# Altium PCB PCB1.PcbDoc
Units mil, origin at the board's own origin, x right, y up, seen from the top; angles counter-clockwise.
Board outline 3350.01 x 1585.07 mil, 4 copper layers (Top Layer, GND, PWR, Bottom Layer), stack 12.534 mil thick; 22 components, 16 nets, 61 pads, 20 vias.
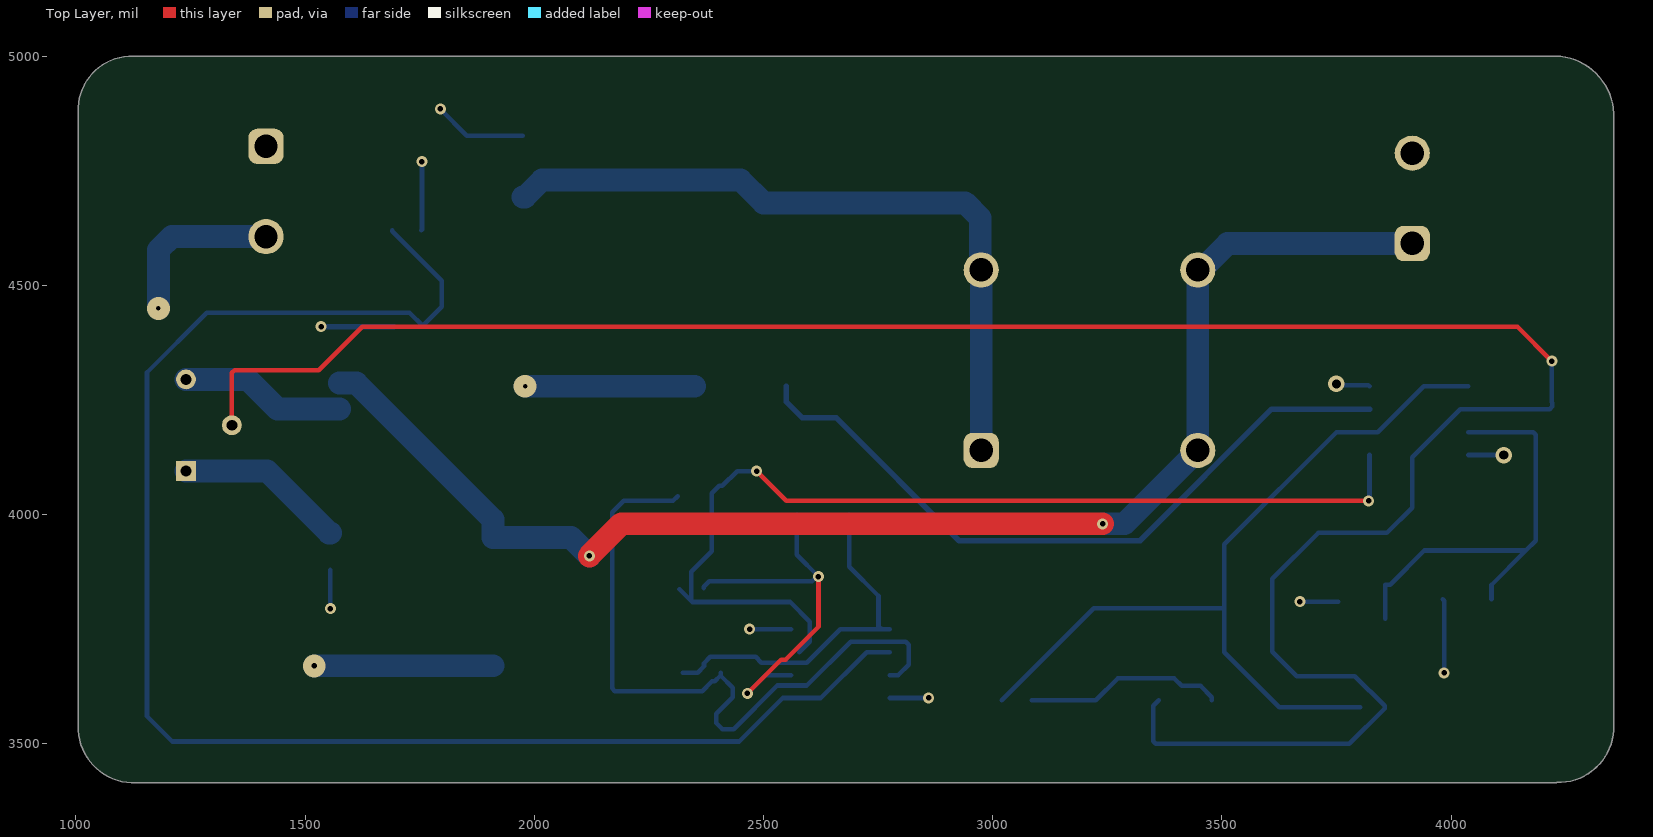
[diagram p0: Top Layer view]
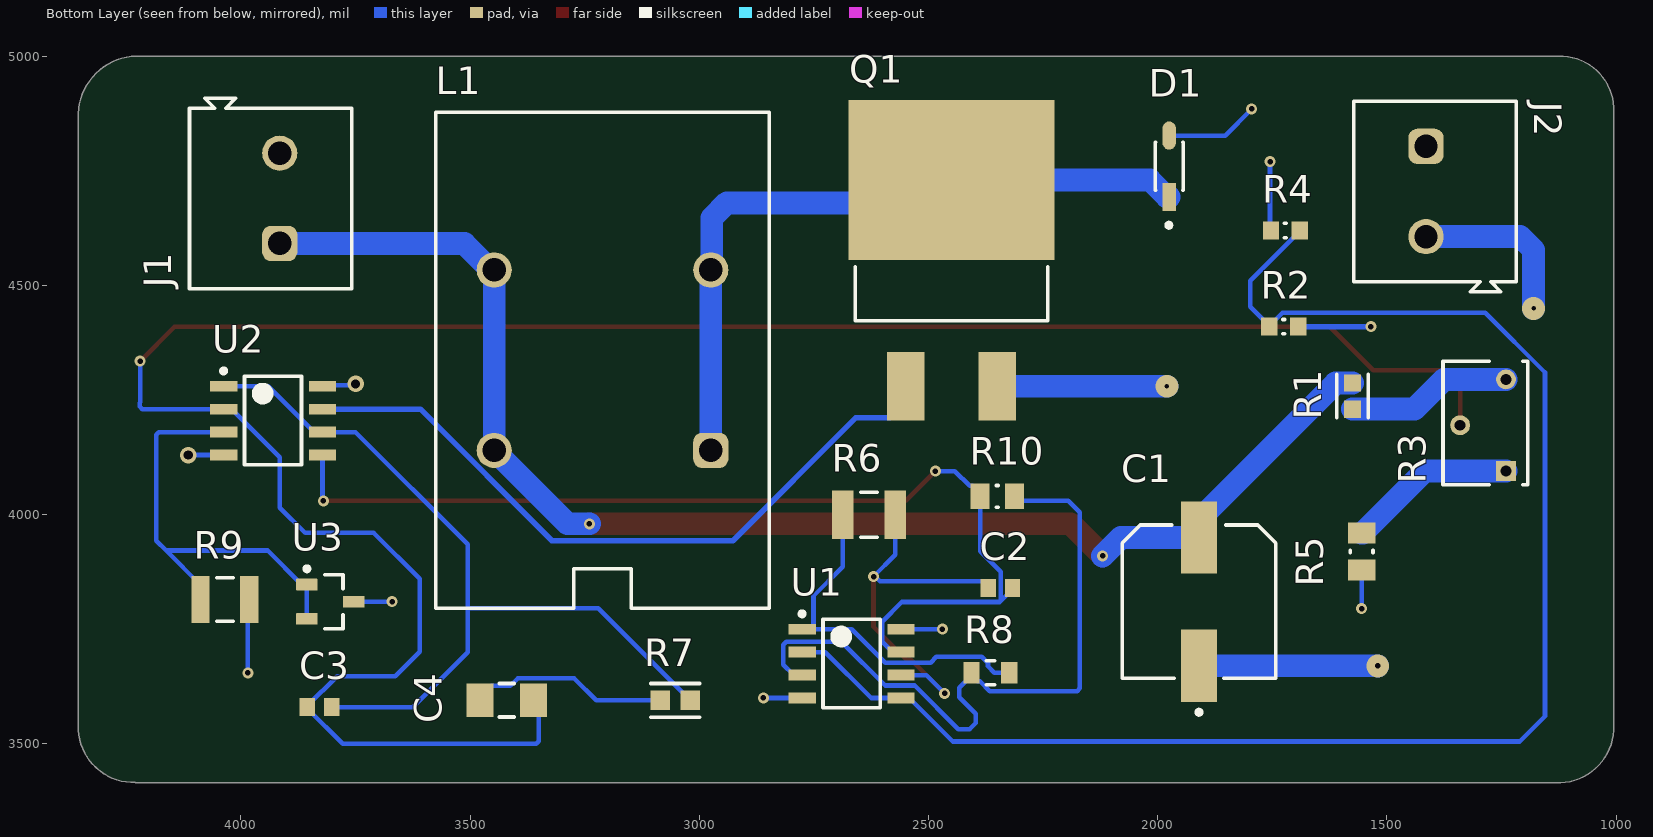
[diagram p1: Bottom Layer view, seen from below]
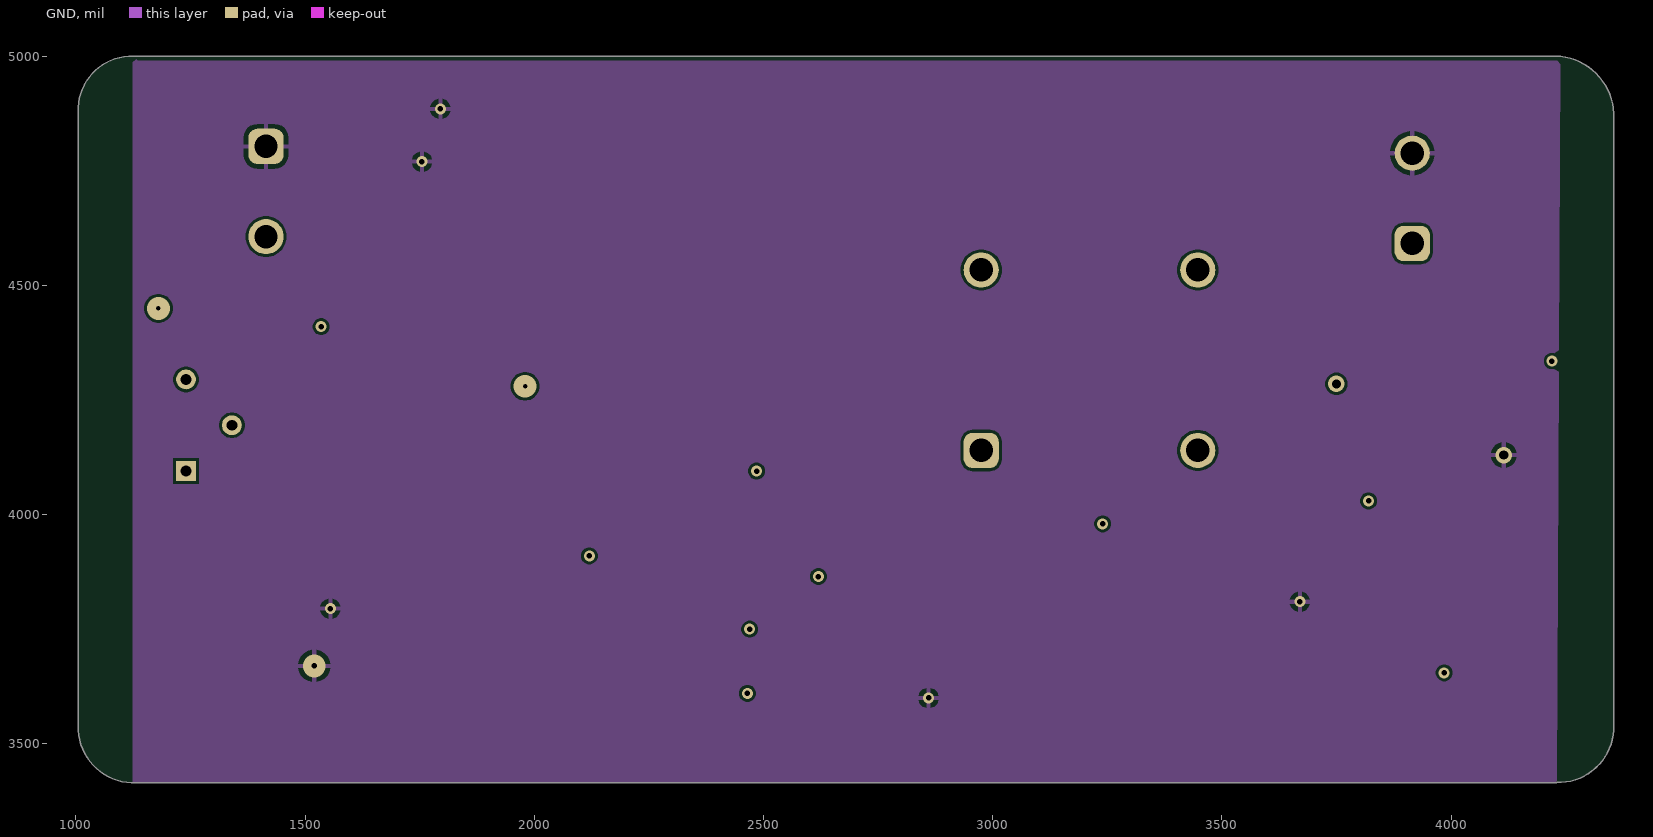
[diagram p2: GND]
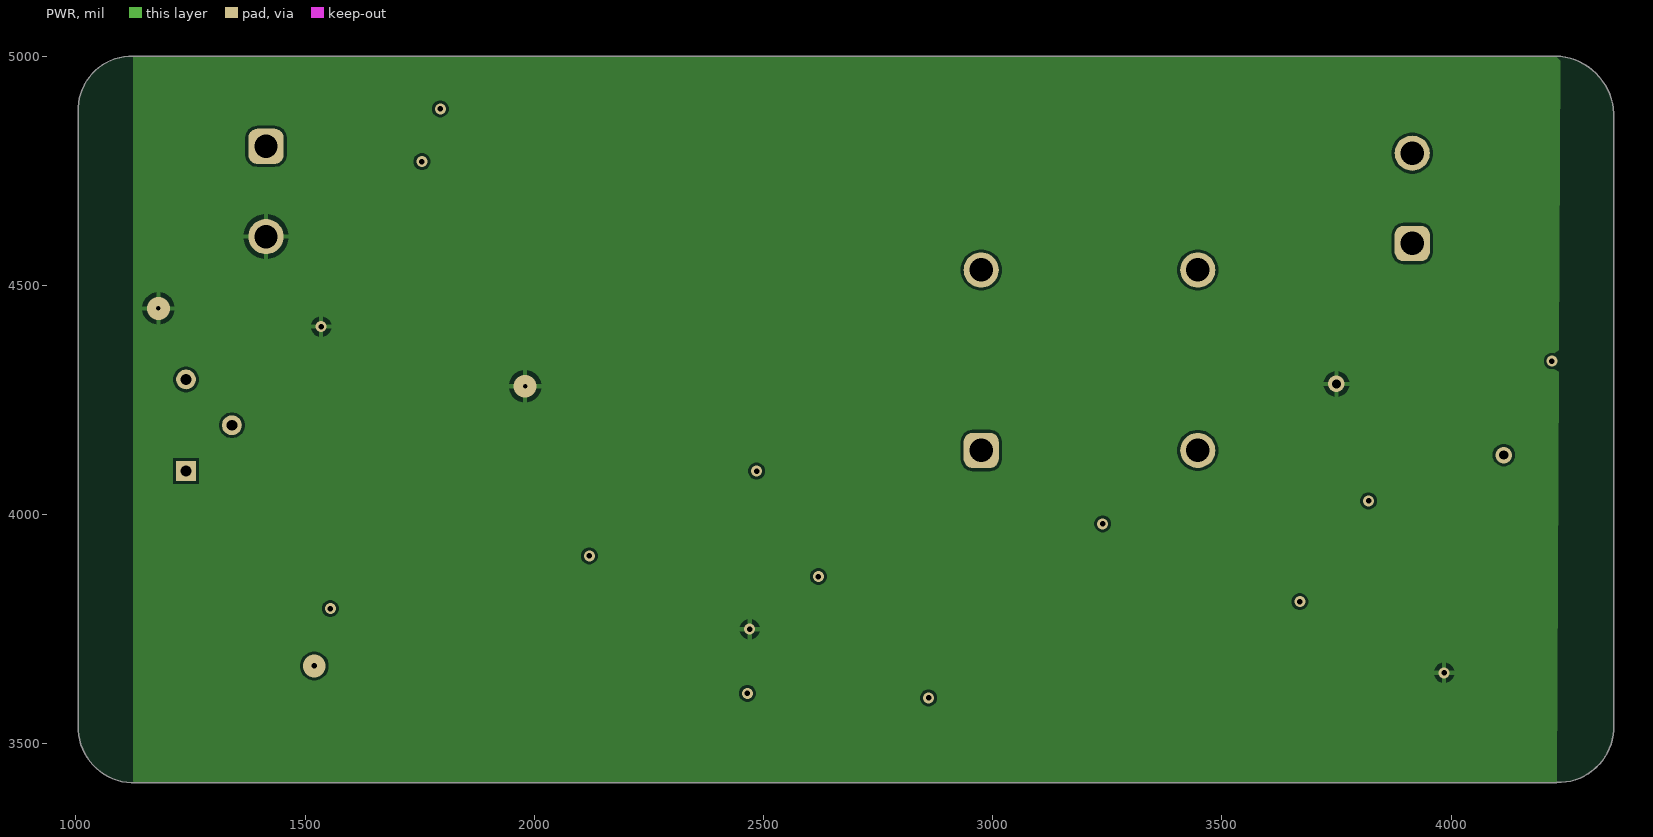
[diagram p3: PWR]
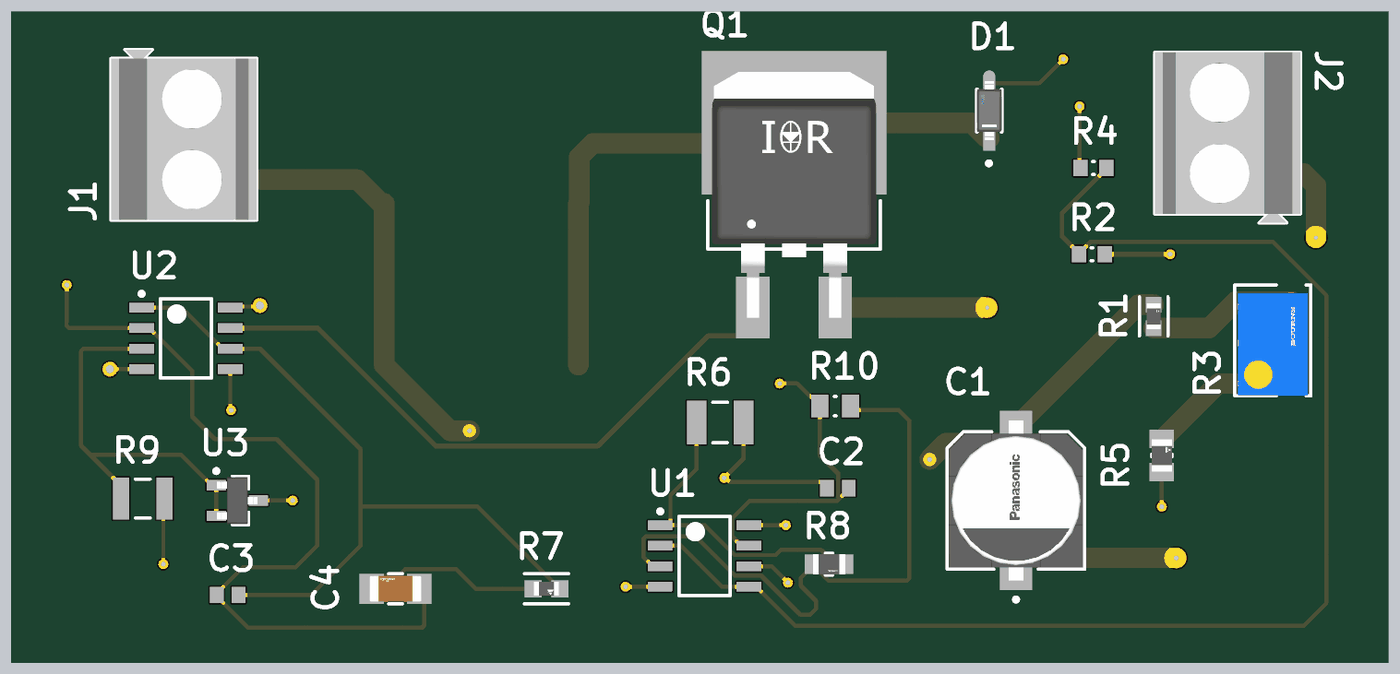
[diagram p4: 3D render of the assembled board from below, using the file's embedded part models]

## Layer stack, top to bottom
Top Solder: solder mask 0.4, Solder Resist, Dk 3.5
Top Layer: signal copper 0.689
Dielectric 2: prepreg 2.8, PP-006, Dk 4.1
GND: signal copper 1.378
Dielectric 1: prepreg 2.8, PP-006, Dk 4.1
PWR: signal copper 1.378
Dielectric 3: prepreg 2.8, PP-006, Dk 4.1
Bottom Layer: signal copper 0.689
Bottom Solder: solder mask 0.4, Solder Resist, Dk 3.5

## Board outline
1121.32,3415.01 cw(c1126.23,3536.21) 1005,3540 1005,4888.43 1005.1,4888.43 cw(c1122.02,4883.07) 1125.06,5000.07 4238.68,5000.03 4238.68,4999.99 cw(c4223.2,4868.96) 4355,4875 4355.01,4875 4355.01,3530 4355,3530 cw(c4233.29,3537.51) 4230.12,3415.61 4230.12,3415

## Design rules (kind name [scope] priority, off if disabled: settings)
Clearance [All] p1: gap=6 ignorepadtopadclearanceinfootprint=FALSE
PolygonConnect [All] p1: connectstyle=Relief reliefconductorwidth=10 reliefentries=4 polygonreliefangle="90 Angle" airgapwidth=10
RoutingVias [All] p1: holewidth=12 width=24 viastyle="Through Hole" minholewidth=10 minwidth=12 maxholewidth=28 maxwidth=50
SilkToSolderMaskClearance [IsPad] p1: minsilkscreentomaskgap=2 clearancetoexposedcopper=TRUE
SolderMaskExpansion [All] p1: expansion=4 istentingtop=FALSE
SupplyNets "Schematic Supply Nets_6" [InNet('GND')] p1: voltage=0.000
SupplyNets "Schematic Supply Nets_5" [InNet('VMOS')] p2: voltage=0.000
SupplyNets "Schematic Supply Nets_4" [InNet('Tri')] p3: voltage=0.000
SupplyNets "Schematic Supply Nets_3" [InNet('VCC')] p4: voltage=0.000
SupplyNets "Schematic Supply Nets_2" [InNet('VREF')] p5: voltage=0.000
SupplyNets "Schematic Supply Nets_1" [InNet('V_1')] p6: voltage=0.000
SupplyNets "Schematic Supply Nets" [InNet('Vo')] p7: voltage=0.000
Width [All] p1: maxlimit=100 minlimit=10 preferedwidth=10
29 further rules are at their usual default settings.

## Components (designator, comment, footprint, x,y, rotation, side; value= is the part's Value field where it differs from the comment)
C1 "EEE-FN1K470UP" FP-FNF-MFG 1910,3810 r90 bottom
C2 "VJ0603Y103KXBAC" CAPC1608X92X38NL15T08 2343.43,3840 r180 bottom
C3 "VJ0603Y103KXBAC" CAPC1608X92X38NL15T08 3828.43,3580 r180 bottom
C4 "GRM3195C2A562JA01D" FP-GRM319-0_15-IPC_A 3420,3595 r0 bottom
D1 "1N5819HW-7-F" FP-SOD123-IPC_A 1975,4760 r90 bottom
J1 "691134710002" 691134710002 3935,4690 r90 bottom
J2 "691134710002" 691134710002 1395,4705 r270 bottom
L1 "744824101" "WE-CMB_Type L_L27.5W18.5H33" 53211.22,54336.85 r90 bottom
Q1 "IRF4905STRLPBF" FP-PG-TO263-3-MFG 2450,4555 r180 bottom
R1 "CRCW060327K0JNEAHP" FP-CRCW0603-HPe3-IPC_B 1575,4258.62 r90 bottom
R2 "100K 1% 0603(1608)" RESC0603(1608)_N 1725,4410 r180 bottom value="100000.00 Ohm"
R3 "3260W-1-203" FP-3260W-MFG 1285.12,4199.92 r90 bottom
R4 "100K 1% 0603(1608)" RESC0603(1608)_N 1721.5,4620 r180 bottom value="100000.00 Ohm"
R5 "MCU08050D3302BP500" FP-MCU0805-IPC_A 1555,3919.58 r90 bottom
R6 "CRCW12101K50JNTA" RESC3225X60X45NL20T20 2630,4000 r180 bottom
R7 "MCT06030D2202BP500" FP-MCT0603-IPC_A 3052.65,3595 r180 bottom
R8 "AT0805DRE0710KL" FP-AT0805-MFG 2365,3655 r180 bottom
R9 "CRCW12105K60JNTA" RESC3225X60X45LL20T20 4035,3815 r180 bottom
R10 "8K2 1% 0805(2012)" RESC0805(2012)_N 2350,4040 r180 bottom value="8200.00 Ohm"
U1 "NE5532AD8R2G" ONSC-SOIC-8-751-07_V 2667.87,3675 r180 bottom
U2 "NE5532AD8R2G" ONSC-SOIC-8-751-07_V 3930,4205 r180 bottom
U3 "LM431BIM3" DBZ0003A_M 3805,3810 r180 bottom

## Footprints (in the part's own frame and the unit in brackets; to place one, negate y for a bottom-side part, rotate by r counter-clockwise, add the part's x,y. Pads: shape width x height; smd on the part's side, far side on the other; paste and mask are expansions set on the pad)
691134710002 [mm] "Serie 1347 - 5.00 mm_2 pins"
  rrect50% 1.95x1.95 hole 1.3: 1(-2.5,-0.5)
  round 1.95 hole 1.3: 2(2.5,-0.5)
  silkscreen extent -5,-4.5 5.55,4.5, body extent -5,-4.5 5.55,4.5, height 13.1
CAPC1608X92X38NL15T08 [mm] "Chip Capacitor, 2-Leads, Body 1.60x0.80mm, IPC Medium Density"
  rect 0.85x1 smd: 1(-0.675,0) 2(0.675,0)
  body extent -0.87,-0.48 0.87,0.47, height 0.92
DBZ0003A_M [mm] "SOT23, 3-Leads, Body 3.04x1.4mm, Pitch 0.95mm, IPC Low Density"
  rrect15% 1.2x0.65 smd: 1(-1.3,0.95) 2(-1.3,-0.95) 3(1.3,0)
  silkscreen extent -1.43,-1.5 0.7,1.95, body extent -1.26,-1.46 1.26,1.46, height 0.96
FP-3260W-MFG [mm]
  rect 1.1x1.1 hole 0.6 paste-2539.97 mask+0: 1(-2.665,-1.14)
  round 1.1 hole 0.6 paste-2539.97 mask+0: 2(-0.125,1.4) 3(2.415,-1.14)
  silkscreen extent -3.43,-2.35 3.43,2.35, body extent -3.41,-2.16 2.94,2.16, height 8
FP-AT0805-MFG [mm]
  rect 0.9x1.2 smd paste+0 mask+0: 1(-1.05,0) 2(1.05,0)
  silkscreen extent -0.23,-0.67 0.23,0.67, body extent -1,-0.63 1,0.63, height 0.6
FP-CRCW0603-HPe3-IPC_B [mil]
  rect 37.72x37.88 smd paste+0 mask+0: 1(-28.62,0) 2(28.62,0)
  silkscreen extent -47,-35 47,35, body extent -31,-17 31,17, height 22
FP-FNF-MFG [mm]
  rect 4x2 smd paste+0 mask+0: 1(-3.55,0) 2(3.55,0)
  silkscreen extent -6.25,-4.25 4.25,4.25, body extent -4.95,-4.15 4.95,4.15, height 10.5
FP-GRM319-0_15-IPC_A [mil]
  rect 59.28x73.16 smd paste+0 mask+0: 1(-58.12,0) 2(58.12,0)
  silkscreen extent -17,-37 17,37, body extent -63,-31 63,31, height 38
FP-MCT0603-IPC_A [mil]
  rect 41.88x41.82 smd paste+0 mask+0: 1(-32.65,0) 2(32.65,0)
  silkscreen extent -54,-37 54,37, body extent -31,-17 31,17, height 22
FP-MCU0805-IPC_A [mil]
  rect 45.62x59.38 smd paste+0 mask+0: 1(-40.42,0) 2(40.42,0)
  silkscreen extent -3,-25 3,25, body extent -39,-25 39,25, height 22
FP-PG-TO263-3-MFG [mm]
  rect 2.08x3.81 smd paste+0 mask+0: 1(-2.54,-6.985) 3(2.54,-6.985)
  rect 11.43x8.89 smd paste+0 mask+0: 4(0,4.445)
  silkscreen extent -5.34,-3.36 5.34,-0.38, body extent -5.08,-7.66 5.08,7.59, height 5.09
FP-SOD123-IPC_A [mil]
  rect 61.32x29.23 smd paste+0 mask+0: 1(-66.94,0)
  rrect100% 61.32x29.23 smd paste+0 mask+0: 2(66.94,0)
  silkscreen extent -134,-31 52,31, body extent -72,-31 72,31, height 57
ONSC-SOIC-8-751-07_V [mm] "SOIC, 8-Leads, Body 4.9x3.9mm, Pitch 1.27mm"
  rect 1.52x0.6 smd: 1(-2.74,1.905) 2(-2.74,0.635) 3(-2.74,-0.635) 4(-2.74,-1.905) 5(2.74,-1.905) 6(2.74,-0.635) 7(2.74,0.635) 8(2.74,1.905)
  silkscreen extent -2.87,-2.45 1.58,2.88, body extent -1.95,-2.45 1.95,2.45, height 1.75
RESC0603(1608)_N [mm] "Chip Resistor, Body 1.6x0.8mm, IPC Medium Density"
  rect 0.9x1 smd: 1(-0.8,0) 2(0.8,0)
  silkscreen extent -0.05,-0.4 0.05,0.4, body extent -0.85,-0.47 0.85,0.47, height 0.6
RESC0805(2012)_N [mm] "Chip Resistor, Body 2.0x1.3mm, IPC Medium Density"
  rect 1.05x1.4 smd: 1(-0.95,0) 2(0.95,0)
  silkscreen extent -0.05,-0.6 0.05,0.6, body extent -1.1,-0.67 1.1,0.68, height 0.7
RESC3225X60X45LL20T20 [mm] "Chip Resistor, 2-Leads, Body 3.20x2.50mm, IPC High Density"
  rect 1x2.6 smd: 1(-1.35,0) 2(1.35,0)
  silkscreen extent -0.45,-1.2 0.45,1.2, body extent -1.7,-1.35 1.7,1.35, height 0.6
RESC3225X60X45NL20T20 [mm] "Chip Resistor, 2-Leads, Body 3.20x2.50mm, IPC Medium Density"
  rect 1.2x2.7 smd: 1(-1.45,0) 2(1.45,0)
  silkscreen extent -0.45,-1.25 0.45,1.25, body extent -1.7,-1.35 1.7,1.35, height 0.6
"WE-CMB_Type L_L27.5W18.5H33" [mm] "Common Mode Power Line Choke, 4-Leads, body 27.5x18.5mm"
  rrect50% 1.95x1.95 hole 1.3: 1(-1275,-1276)
  round 1.95 hole 1.3: 2(-1265,-1276) 3(-1265,-1264) 4(-1275,-1264)
  silkscreen extent -1283.75,-1279.25 -1256.25,-1260.75, body extent -1282.4,-1278.5 -1257.6,-1261.47, height 28.88

## Part data
C1: library part CMP-05427-000046-1, "CAP ALUM 47UF 20% 80V SMD"
C2 C3: library part CMP-2006-01186-1, Manufacturer=Vitramon, Part Number=VJ0603Y103KXBAC
C4: library part CMP-1037-03218-2, "Chip Multilayer Ceramic Capacitors for General Purpose, 1206, 5600pF, C0G, 30ppm/°C, 5%, 100V", Capacitance=5.6nF, Case Code (Imperial)=1206, Case Code (Metric)=3216, Dielectric=C0G, Max Operating Temperature=125°C, Min Operating Temperature=-55°C, Package Quantity=4000, Tolerance=5%, Voltage Rating=100V, Case/Package=1206, Depth=1.6mm, Height=0.85mm, Lead Free="Lead Free", Length=3.2mm, Mount="Surface Mount", Packaging="Tape and Reel", Radiation Hardening=No, Termination=SMD/SMT, Thickness=0.037inch, Voltage Rating (DC)=100V, Width=1.6mm
D1: library part CMP-0303-00003-3, "DIODE SCHOTTKY 40V 1A SOD123", Average Rectified Current=1A, Capacitance=110pF, Case/Package=SOD-123-2, Forward Voltage=450mV, Max Forward Surge Current (Ifsm)=25A, Max Operating Temperature=125°C, Max Power Dissipation=450mW, Max Repetitive Reverse Voltage (Vrrm)=40V, Min Operating Temperature=-65°C, Package Quantity=3000, Peak Reverse Current=50uA, Contact Plating=Tin, Current Rating=1A, Element Configuration=Single, Forward Current=1A, Height=1.25mm, Lead Free="Lead Free", Length=2.85mm, Max Reverse Voltage (DC)=40V, Number of Pins=2, Output Current=1A, Packaging="Tape and Reel", Peak Non-Repetitive Surge Current=25A, Polarity=Standard, Radiation Hardening=No, REACH SVHC="No SVHC", Termination=SMD/SMT, Voltage Rating (DC)=40V, Weight=0.000353oz, Width=1.7mm
J1 J2: library part CMP-1502-03295-3, "Wire-To-Board Terminal Block, 5mm Pitch, Horizontal, Screw, 2 Poles"
L1: library part CMP-0223-00095-2, Inductance=1mH, Inductance Tolerance=30%, Resistance=7mΩ, NexarPartId=22862926, Number of Pins=4, Packaging=Bulk, RoHS=Compliant
Q1: library part CMP-32901-000610-1, "MOSFET P-CH 55V 42A D2PAK", Case/Package=TO-263-3, Continuous Drain Current (ID)=42A, Drain to Source Voltage (Vdss)=-55V, Input Capacitance=3.5nF, Max Operating Temperature=150°C, Max Power Dissipation=170W, Min Operating Temperature=-55°C, Threshold Voltage=4V, Halogen Free="Halogen Free", Lead Free="Contains Lead", Max Dual Supply Voltage=-55V, Mount="Surface Mount", Number of Pins=3, Packaging="Tape and Reel", Rds On Max=20mR, REACH SVHC="No SVHC", RoHS Compliant=Yes
R1: library part CMP-02407-002948-1, "RES Thick Film, 27kΩ, 5%, 0.33W, 200ppm/°C, 0603", Case/Package=0603, Max Power Dissipation=250mW, Package Quantity=5000, Resistance=27kR, Temperature Coefficient=200ppm/°C, Tolerance=5%, Composition="Thick Film", Features="Automotive AEC-Q200", Height=0.022inch, Lead Free="Lead Free", Length=0.063inch, Number of Terminations=2, Packaging="Tape and Reel", Width=0.033inch
R2 R4: library part CMP-1012-00736-1, "100K 0.1W 1% 0603 (1608 Metric)  SMD", Case-EIA=0603, Case-Metric=1608, Power="0.1 W", Tolerance="1 %", Technology=SMT
R3: library part CMP-00059-01030895-1, "3260W-1-203 Resistor Trimmer, Wirewound, 20 kOhm, ± 5%, 250 mW, 11 Turn, Multi Turn, Through Hole", Max Operating Temperature=150°C, Max Power Dissipation=250mW, Min Operating Temperature=-65°C, Resistance=20kΩ, Temperature Coefficient=70ppm/°C, Tolerance=5%, Voltage Rating (DC)=500V, Composition=Wirewound, Depth=4.32mm, Height=6.35mm, Length=6.35mm, Military Standard=Not, Mount="Panel, Through Hole", NexarPartId=1030895, Number of Turns=11, Packaging=Bulk, Power Rating=250mW, Radiation Hardening=No, RoHS=Compliant, Schedule B=8533310000, Taper=Linear, Termination=Pin, Weight=425.242847mg, Width=2.54mm
R5: library part CMP-02407-004085-1, "RES 1.05K OHM 0.5% 1/5W 0805", Case/Package=0805, Resistance=33000R, Tolerance=0.1%, Height=450um, Lead Free="Lead Free", Length=2mm, Width=1.25mm
R6: library part CMP-2005-00722-1, Manufacturer="Vishay Dale", Part Number=CRCW12101K50JNTA
R7: library part CMP-02407-001201-1, "RES SMD 100 OHM 1% 1/8W 0603", Case/Package=0603, Max Operating Temperature=125°C, Max Power Dissipation=100mW, Min Operating Temperature=-55°C, Package Quantity=5000, Resistance=22kR, Temperature Coefficient=25ppm/°C, Tolerance=0.1%, Composition="Thin Film", Contact Plating=Tin, Depth=0.85mm, Height=0.022inch, Lead Free="Lead Free", Length=0.061inch, Military Standard=Not, Number of Terminations=2, Packaging="Tape and Reel", Radiation Hardening=No, Width=0.033inch
R8: library part CMP-03412-049031-1, "Thin Film Chip Resistors Automotive Grade 10kΩ 0.5% 50ppm/°C 0805", Case/Package=0805, Max Operating Temperature=155°C, Max Power Dissipation=125mW, Min Operating Temperature=-55°C, Ratings=AEC-Q200, Resistance=10kR, Resistor Type="Thin Film", Temperature Coefficient=50ppm/°C, Tolerance=0.5%, Features="Moisture Resistant", Height=0.024inch, Length=0.079inch, Number of Terminations=2, Packaging="Tape and Reel", RoHS Compliant=Yes, Series=AT, Width=0.049inch
R9: library part CMP-2005-00740-1, Manufacturer="Vishay Dale", Part Number=CRCW12105K60JNTA
R10: library part CMP-1013-00613-1, "8K2 0.125W 1% 0805 (2012 Metric)  SMD", Case-EIA=0805, Case-Metric=2012, Power="0.125 W", Tolerance="1 %", Technology=SMT
U1 U2: library part CMP-1310-00252-1, "Internally Compensated Dual Low Noise Operational Amplifier, 6 to 40 V, 0 to 70 degC, 8-Pin SOIC, Pb-Free, Tape and Reel", Manufacturer="On Semiconductor", ComponentLink1Description="Manufacturer URL", ComponentLink1URL=http://www.onsemi.com/, ComponentLink2Description=Datasheet, ComponentLink2URL=http://www.onsemi.cn/pub_link/Collateral/NE5532-D.PDF, ComponentLink3Description="Package Specification", ComponentLink3URL=http://www.onsemi.com/pub_link/Collateral/751-07.PDF, DatasheetVersion="Rev. 2", GBW Typ (MHz)=10, Mounting Technology="Surface Mount", PackageDescription="8-Pin Small Outline Integrated Circuit, Body 4.9 x 3.9 mm, Pitch 1.27 mm", PackageReference=SOIC-8-751-07, PackageVersion="Rev. AK, 02/2011", Packing="Tape and Reel", PartNumber=NE5532AD8R2G, RoHS=TRUE, SR Typ (V/uS)=9, VCC Max (V)=40, VCC Min (V)=6
U3: library part CMP-0063-01142-3, "Adjustable Precision Zener Shunt Regulator, 3-pin SOT-23", Manufacturer="Texas Instruments", PackageTopMarking=N1C*XTT, PowerWise=N, ComponentLink1Description="Datasheet URL", ComponentLink1URL=http://www.ti.com/general/docs/lit/getliterature.tsp?genericPartNumber=LM431&fileType=pdf, CompType=MiscPower, PackageDescription="Molded SOT-23, .115 x .051 x .037in Body, 3 Lead, .075 in Pitch", PackageReference=DBZ0003A, PinCount=3, RoHS=N

## Via types
v1: diameter 24, hole 12, Top Layer to Bottom Layer, 15 vias
v2: diameter 50, hole 10, Top Layer to Bottom Layer, 2 vias
v3: diameter 50, hole 12, Top Layer to Bottom Layer, 1 vias
v4: diameter 36, hole 20, Top Layer to Bottom Layer, 1 vias
v5: diameter 36/36/36/36 (per signal layer), hole 20, Top Layer to Bottom Layer, 1 vias

## Nets (pads, with @x,y where several pads share a name; then routed paths per layer and width w, separated by ;. In a path a pad name is that pad's centre, name@x,y a point inside that pad or via, vN(x,y) a via of type N, cw(c..) or ccw(c..) an arc to the next point about the centre after c; other vN are vias at no path point)
GND: C1.1 D1.2 J1.2 J2.1 R4.1 R5.1 U1.4 U2.4 U3.3 | length 1074.3
  Bottom Layer w10: v1(1555,3795) R5.1 ; R4.1 1755,4622.01 v1(1755,4770) ; v1(1795,4885) 1853.06,4826.94 D1.2 ; U1.4 v1(2860,3600) ; v1(3670,3810) U3.3 ; U2.4 v4(4115,4130)
  Bottom Layer w50: v3(1520,3670) 1520.24,3670.24 C1.1
NetC2_1: C2.1 R6.2 U1.6 | length 853.2
  Top Layer w10: v1(2465,3610) 2538.84,3683.84 2548.84,3683.84 2620,3755 v1(2620,3865)
  Bottom Layer w10: C2.1 2370,3842.95 2381.73,3854.69 2605.9,3854.69 2616.21,3865 v1(2620,3865) 2572.91,3912.09 R6.2 ; v1(2465,3610) 2505,3650 U1.6
NetC3_2: C3.2 R7.2 U2.1 U2.6 | length 1825.4
  Bottom Layer w10: R7.2 3220.54,3795.51 3505,3795.51 ; C3.2 3625,3580 3505,3700 3505,3795.51 ; U2.1 3940.24,4280 3840.24,4180 U2.6 3750,4180 3505,3935 3505,3795.51
NetC4_2: C4.2 R7.1 | length 436.3
  Bottom Layer w10: R7.1 3224.87,3595 3272.45,3642.58 3396.08,3642.58 3412.08,3626.58 3453.48,3626.58 3478.12,3601.94 C4.2
NetD1_1: D1.1 L1.1 L1.2 Q1.4 | length 1555.5
  Bottom Layer w50: D1.1 1979.72,4693.06 2016.67,4730 Q1.4 2500,4680 2940,4680 2972.91,4647.09 2972.91,4535.79 L1.2 L1.1
NetR1_1: R1.1 R3.3 | length 361.7
  Bottom Layer w50: R3.3 1375.12,4295 1440.12,4230 R1.1
NetR3_1: R3.1 R5.2 | length 370.7
  Bottom Layer w50: R3.1 1417.5,4095 1552.5,3960 R5.2
NetR6_1: R6.1 R8.2 U1.1 | length 785
  Bottom Layer w10: R8.2 2356.38,3655 2370.22,3668.84 2370.22,3675.78 2384.07,3689.62 2483.06,3689.62 2495.49,3677.19 2594.48,3677.19 2667.29,3750 U1.1@2757.64,3750 ; R6.1 2687.09,3886.2 2750.83,3822.46 2750.83,3756.81 U1.1@2757.64,3750 ; U1.1 U1.1@2757.64,3750
NetR8_1: R8.1 R10.2 U1.3 | length 1530.7
  Bottom Layer w10: R10.2 2302.6,4030 2195,4030 2170,4005 2170,3620.86 2175.86,3615 2366.34,3615 2387.72,3636.38 2393.62,3636.38 R8.1@2406.34,3649.09 ; R8.1 R8.1@2406.34,3649.09 ; U1.3 2793.86,3650 2816.67,3672.81 2816.67,3716.37 2810.23,3722.81 2690.1,3722.81 2594.48,3627.19 2529.9,3627.19 2434.71,3532 2410.47,3532 2397,3545.47 2397,3565.76 2433.2,3601.95 2433.2,3622.24 R8.1@2406.34,3649.09
NetR9_1: R9.1 U2.3 U3.1 U3.2 | length 961.5
  Bottom Layer w10: U3.2 U3.1 3867.01,3847.4 3941.28,3921.67 4163.33,3921.67 ; U2.3 4179.14,4180 4185,4174.14 4185,3943.35 4163.33,3921.67 ; R9.1 4088.15,3846.5 4163.33,3921.67
Tri: C2.2 R10.1 U1.7 U2.5 | length 2219.3
  Top Layer w10: v1(2485,4095) 2550,4030 v1(3820,4030)
  Bottom Layer w10: C2.2@2316.85,3837.05 2344.58,3809.31 2557.97,3809.31 2600.92,3766.37 2600.92,3722.81 U1.7@2578.11,3700 ; 2342.27,3815.76 2342.27,3875.26 2387.4,3920.39 R10.1 2387.4,4046.89 2403.07,4062.56 2409.96,4062.56 2442.4,4095 v1(2485,4095) ; v1(3820,4030) 3822.13,4032.13 U2.5
V_1: C3.1 C4.1 R3.2 U2.2 | length 5089.7
  Top Layer w10: R3.2 1340.24,4309.14 1346.09,4315 1530,4315 1625,4410 4145,4410 v1(4220,4335)
  Bottom Layer w10: C4.1 3350,3583.12 3350,3505.86 3355.86,3500 3777.95,3500 3855,3577.05 C3.1 3855,3582.95 3790.18,3647.77 3663.09,3647.77 3610,3700.86 3610,3860 3710,3960 3860,3960 3915,4015 3915,4125.24 4019.76,4230 U2.2 4215,4230 4220.86,4235.86 4220.86,4244.14 4220,4245 v1(4220,4335)
VCC: J2.2 Q1.3 R2.2 R9.2 U1.8 U2.8 | length 1228.1
  Bottom Layer w10: v1(2470,3750) U1.8 ; v5(3750,4285) 3752.5,4282.5 3819.63,4282.5 U2.8 ; R9.2 3985,3811.85 v1(3985,3655)
  Bottom Layer w12: v1(1535,4410) R2.2
  Bottom Layer w50: v2(1180,4450) 1180,4577.29 1209.29,4606.57 J2.2 ; v2(1980,4280) Q1.3
VMOS: Q1.1 U2.7 | length 1550.5
  Bottom Layer w12: Q1.1 2550,4245.94 2584.94,4211 2659,4211 2927,3943 3321.7,3943 3608.7,4230 U2.7
Vo: C1.2 J1.1 L1.3 L1.4 R1.2 | length 3032.6
  Top Layer w50: v1(2120,3910) 2190,3980 v1(3240,3980)
  Bottom Layer w50: R1.2 1611.89,4287.24 1910,3989.13 C1.2 2080.24,3949.76 v1(2120,3910) ; v1(3240,3980) 3287.44,3980 L1.4 L1.3 3454.69,4533.7 3512.56,4591.57 J1.1
VREF: R2.1 R4.2 U1.2 U1.5 | length 3413.8
  Bottom Layer w10: R4.2 1690,4618.03 1798.03,4510 1798.03,4453.5 R2.1@1756.5,4411.97 ; R2.1 R2.1@1756.5,4411.97 ; U1.2 2725,3700 2625,3600 U1.5 2541.89,3600 2446.89,3505 1210,3505 1155,3560 1155,4310 1285.69,4440.69 1727.78,4440.69 R2.1@1756.5,4411.97

## Polygon pours and split planes (outlines as drawn)
VCC on PWR "VCC_L03_P000" (solid, pour order 0): 4238.68,4999.99 4238.6,5000.07 1125.06,5000.07 1125.06,3418.76 1121.91,3415.61 4230.12,3415.61
GND on GND "GND_L02_P001" (solid, pour order 1): 4238.63,4990.08 1134.92,4990.08 1130,4995 1123.49,4988.49 1123.49,3417.18 4227.93,3417.18 4230.12,3415

## Silkscreen, mask and mechanical layers (free items; w line width, h text height)
Mechanical 1:
  lines w10: 1005,4888.43 1005,3540 ccw(c1126.23,3536.21) 1121.32,3415.01 4230.12,3415 ; 1005.1,4888.43 cw(c1122.02,4883.07) 1125.06,5000.07 4238.68,5000.03 ; 4230.12,3415.61 ccw(c4233.29,3537.51) 4355,3530 4355.01,4875 ccw(c4223.2,4868.96) 4238.68,4999.99